# Altium PCB 遥控器.PcbDoc
Units mil, origin at the board's own origin, x right, y up, seen from the top; angles counter-clockwise.
Board outline 1455 x 3840 mil, 2 copper layers (Top Layer, Bottom Layer); 33 components, 26 nets, 144 pads, 0 vias.
Unrouted connection lines stored in the file: 1.
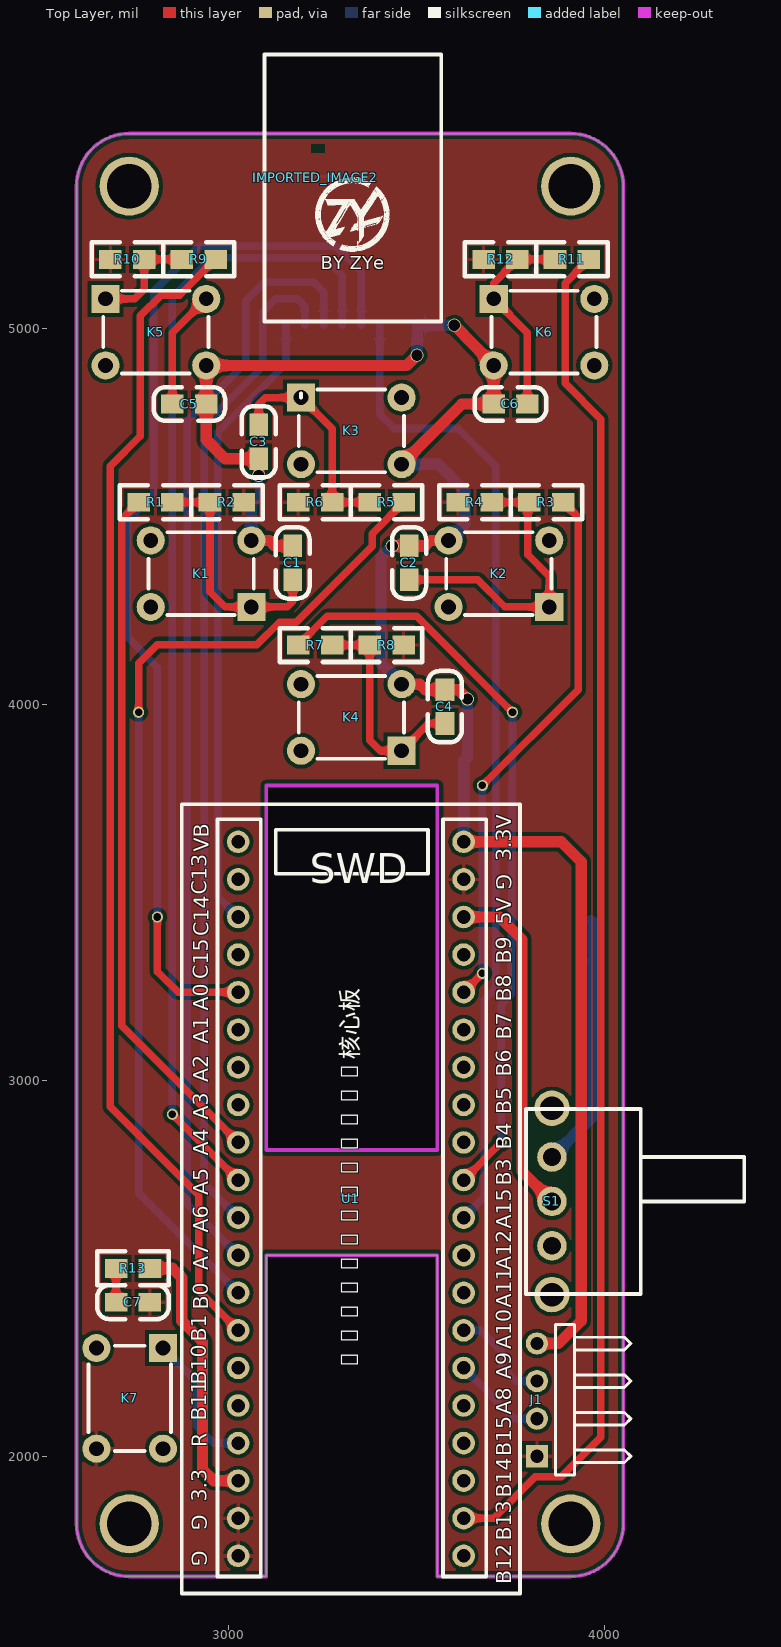
[diagram p0: Top Layer view]
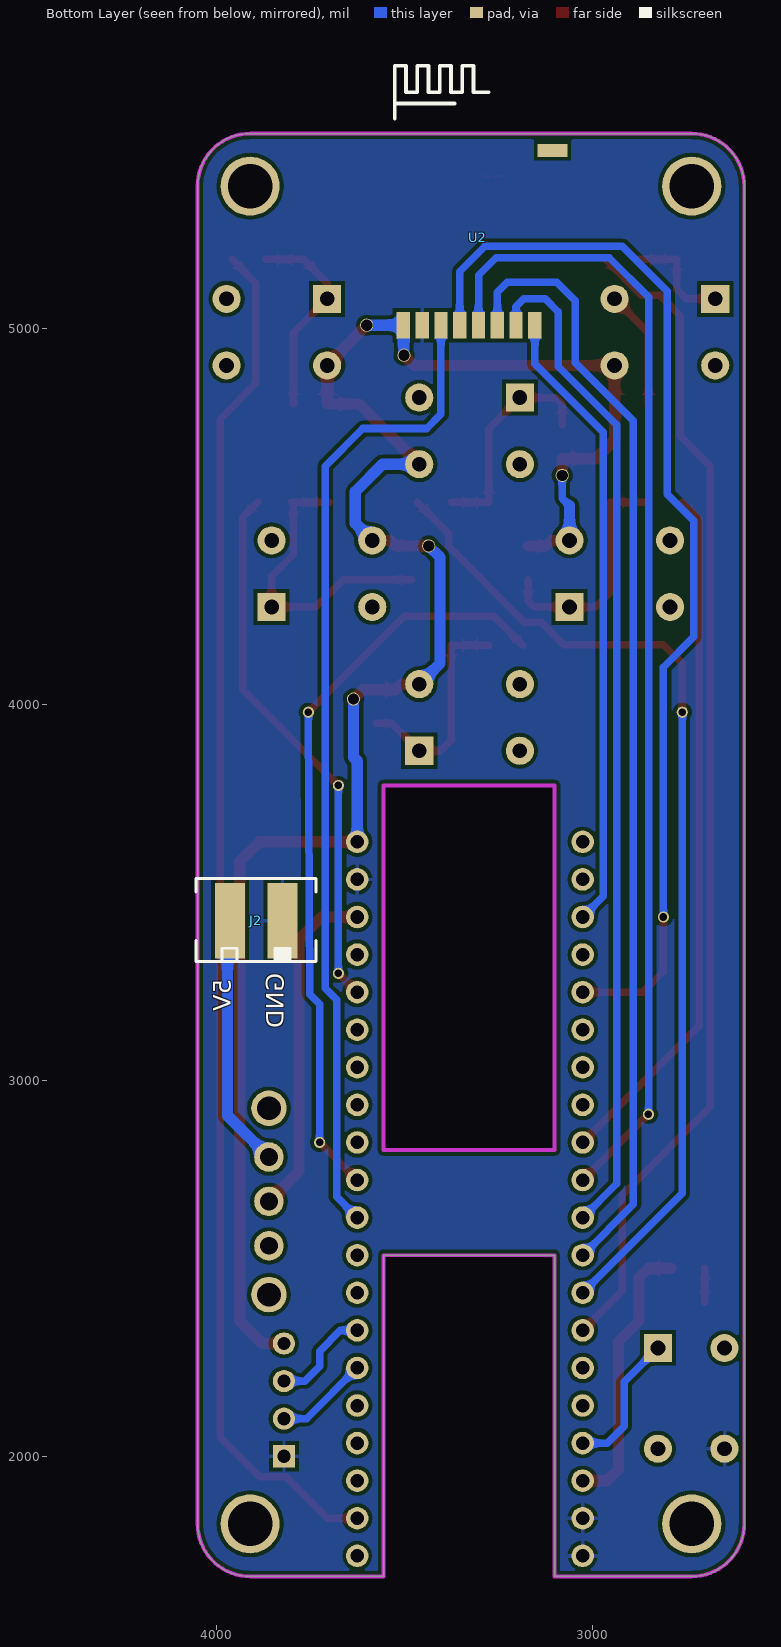
[diagram p1: Bottom Layer view, seen from below]
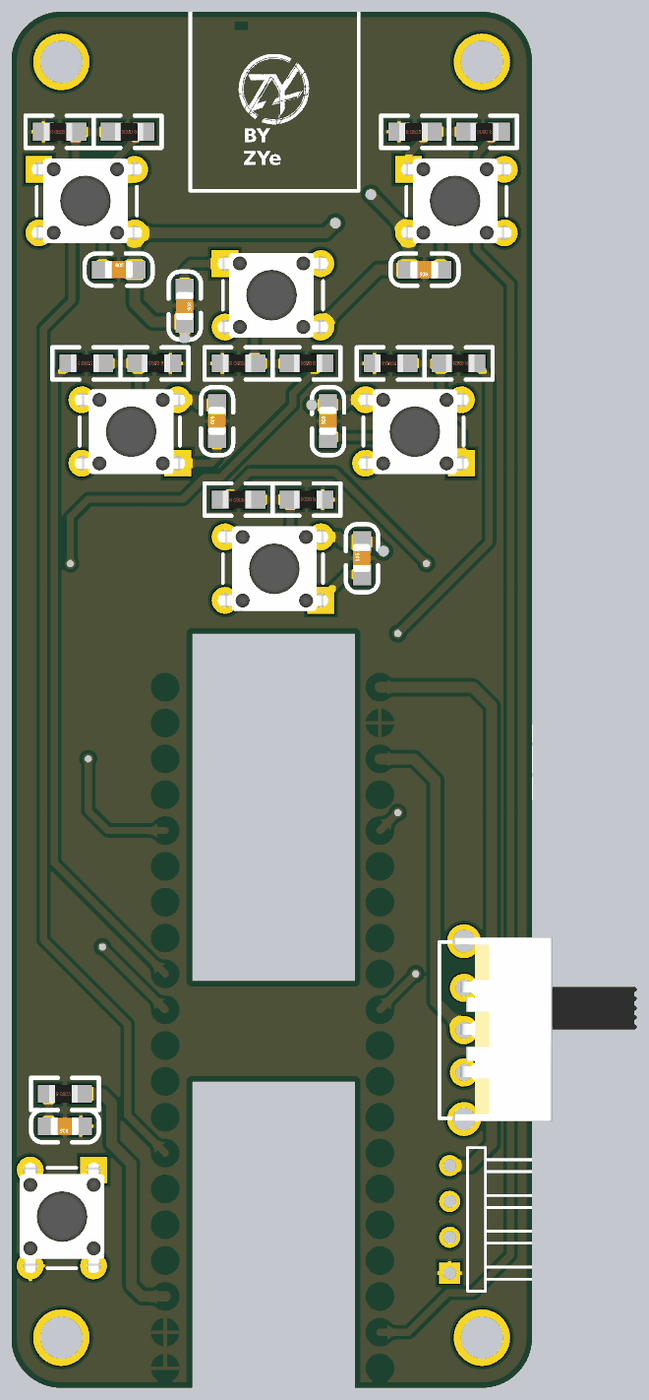
[diagram p2: 3D render of the assembled board from above, using the file's embedded part models]

## Layer stack, top to bottom
Top Solder: solder mask 0.4, Solder Resist, Dk 3.5
Top Layer: signal copper 1.4
Dielectric 1: dielectric 12.6, FR-4, Dk 4.8
Bottom Layer: signal copper 1.4
Bottom Solder: solder mask 0.4, Solder Resist, Dk 3.5

## Board outline
2595,1820 ccw(c2735,1820) 2735,1680 3100,1680 3100,2535 3555,2535 3555,1680 3910,1680 ccw(c3910,1820) 4050,1820 4050,5380 ccw(c3910,5380) 3910,5520 2735,5520 ccw(c2735,5380) 2595,5380
cut-out: 3100,2815 3555,2815 3555,3785 3100,3785

## Design rules (kind name [scope] priority, off if disabled: settings)
Clearance [All] p1: gap=10 ignorepadtopadclearanceinfootprint=FALSE except(0: Arc-Hole Track-Hole SMDPad-Hole THPad-Hole Via-Hole Fill-Hole Poly-Hole Region-Hole Text-Hole)
PolygonConnect [All] p1: connectstyle=Relief reliefconductorwidth=10 reliefentries=4 polygonreliefangle="90 Angle" airgapwidth=10
RoutingVias [All] p1: holewidth=28 width=50 viastyle="Through Hole" minholewidth=28 minwidth=50 maxholewidth=28 maxwidth=50
SolderMaskExpansion [All] p1: expansion=4
Width [All] p1: maxlimit=100 minlimit=20 preferedwidth=20
30 further rules are at their usual default settings.

## Components (designator, comment, footprint, x,y, rotation, side; value= is the part's Value field where it differs from the comment)
C1 "104" 0805C 3169.6,4333.27 r90 top
C2 "104" 0805C 3479.6,4333.27 r90 top
C3 "104" 0805C 3080,4743.89 r270 top
C4 "104" 0805C 3574.6,3950.71 r90 top
C5 "104" 0805C 2850.71,4800.54 r0 top
C6 "104" 0805C 3793.89,4799.88 r180 top
C7 "104" 0805C 2789.29,2409.6 r180 top
IMPORTED_IMAGE2 "Comment" IMPORTED_IMAGE 3230.35,5401.92 r0 top (schematic designator IMPORTED_IMAGE)
J1 "usart1" "Pin HDR1X4/2.54mm-W" 3820,2000 r90 top
J2 "PH2.0-2P" PH2.0S-2P 3855,3525 r0 bottom
K1 "KEY" DIP-6X6X5 3060,4260 r180 top
K2 "KEY" DIP-6X6X5 3852.72,4260 r180 top
K3 "KEY" DIP-6X6X5 3192.28,4817.17 r0 top
K4 "KEY" DIP-6X6X5 3460,3877.43 r180 top
K5 "KEY" DIP-6X6X5 2672.28,5080 r0 top
K6 "KEY" DIP-6X6X5 3705,5080 r0 top
K7 "KEY" DIP-6X6X5 2825,2287.72 r270 top
R1 "1K" 0805R 2760,4538.57 r0 top
R2 "4.7K" 0805R 3040,4538.57 r180 top
R3 "1K" 0805R 3890,4538.57 r180 top
R4 "4.7K" 0805R 3610,4538.57 r0 top
R5 "1K" 0805R 3465,4538.57 r180 top
R6 "4.7K" 0805R 3185,4538.57 r0 top
R7 "1K" 0805R 3185,4158.6 r0 top
R8 "4.7K" 0805R 3465,4158.6 r180 top
R9 "1K" 0805R 2965,5185 r180 top
R10 "4.7K" 0805R 2685,5185 r0 top
R11 "1K" 0805R 3958.12,5185 r180 top
R12 "4.7K" 0805R 3678.12,5185 r0 top
R13 "10K" 0805R 2700,2500 r0 top
S1 "SS-12F23" SS-12F23 3860,2430.08 r90 top
U1 "STM32F103C8T6核心板" STM32F103 4526.5,2909 r0 top
U2 "" "NRF24L01+ SMD" 3330.25,5354.78 r90 bottom

## Footprints (in the part's own frame and the unit in brackets; to place one, negate y for a bottom-side part, rotate by r counter-clockwise, add the part's x,y. Pads: shape width x height; smd on the part's side, far side on the other; paste and mask are expansions set on the pad)
0805C [mil]
  rect 60x50 smd: 1(-0.71,-0.4) 2(89.29,-0.4)
  silkscreen extent -51,-45 139,45, body extent 6,-25 84,25, height 31
0805R [mil]
  rect 60x50 smd: 1(0,0) 2(90,0)
  silkscreen extent -50,-45 140,45, body extent 1,-25 80,25, height 15
DIP-6X6X5 [mm]
  rect 1.9x1.9 hole 1: 1(0,0)
  round 1.9 hole 1: 2(0,-4.5) 3(6.8,-4.5) 4(6.8,0)
  silkscreen extent -0.16,-5.04 6.96,0.54, body extent -0.8,-5.24 7.41,0.76, height 4.95
IMPORTED_IMAGE [mil]
  silkscreen extent 0,-196 197,0
"NRF24L01+ SMD" [mil]
  rect 70.86x35.44 smd: 1(-344.78,172.01) 2(-344.78,122.01) 3(-344.78,72.01) 4(-344.78,22.01) 5(-344.78,-27.99) 6(-344.78,-77.99) 7(-344.78,-127.99) 8(-344.78,-177.99)
  rect 35.44x80 smd: 9(120,-225)
  silkscreen extent 205,-55 345,195
PH2.0S-2P [mil]
  rect 80x200 smd: 1(-31.26,100) 2(108.74,100)
  silkscreen extent -121,-12 199,208, body extent -117,-99 198,208, height 242
"Pin HDR1X4/2.54mm-W" [mm] "Connector; Header; 4 Position; Right Angle"
  rect 1.5x1.5 hole 0.9: 1(0,0)
  round 1.5 hole 0.9: 2(2.54,0) 3(5.08,0) 4(7.62,0)
  silkscreen extent -1.27,-6.35 8.89,-1.27, body extent -1.27,-10 8.89,0.35, height 2.54
SS-12F23 [mm]
  round 2.4 hole 1.6: 0(0,0) 0(12.6,0)
  round 2 hole 1.2: 1(3.3,0) 2(6.3,0) 3(9.3,0)
  silkscreen extent 0.05,-13 12.55,1.75, body extent -0.14,-12.27 12.86,0.63, height 5.75
STM32F103 [mil]
  round 60 hole 36: 1(-1501.5,726) 2(-1501.5,626) 3(-1501.5,526) 4(-1501.5,426) 5(-1501.5,326) 6(-1501.5,226) 7(-1501.5,126) 8(-1501.5,26) 9(-1501.5,-74) 10(-1501.5,-174) 11(-1501.5,-274) 12(-1501.5,-374) 13(-1501.5,-474) 14(-1501.5,-574) 15(-1501.5,-674) 16(-1501.5,-774) 17(-1501.5,-874) 18(-1501.5,-974) 19(-1501.5,-1074) 20(-1501.5,-1174) 21(-901.5,-1174) 22(-901.5,-1074) 23(-901.5,-974) 24(-901.5,-874) 25(-901.5,-774) 26(-901.5,-674) 27(-901.5,-574) 28(-901.5,-474) 29(-901.5,-374) 30(-901.5,-274) 31(-901.5,-174) 32(-901.5,-74) 33(-901.5,26) 34(-901.5,126) 35(-901.5,226) 36(-901.5,326) 37(-901.5,426) 38(-901.5,526) 39(-901.5,626) 40(-901.5,726)
  silkscreen extent -1652,-1274 -752,826

## Part data
C1 C2 C3 C4 C5 C6 C7: library part CAP, "无极性电容"
J1: library part "Pin HDR1X4"
R1 R2 R3 R4 R5 R6 R7 R8 R9 R10 R11 R12 R13: library part RES
U2: library part nRF24l01

## Free pads (board coordinates)
  round 157.48 hole 118.11: 2(2735,1820) 2(2735,5380) 2(3910,1820) 2(3910,5380)
  round 30 hole 20: 2(2760,3980) 2(2810,3435) 2(2850,2910) 2(3675,3285) 2(3675,3785) 2(3725,2835) 2(3755,3980)
  round 35 hole 30: 2(3079.6,4610) 2(3435,4422.57) 2(3500.69,4930) 2(3599.9,5010) 2(3635,4015)

## Nets (pads, with @x,y where several pads share a name; then routed paths per layer and width w, separated by ;. In a path a pad name is that pad's centre, name@x,y a point inside that pad or via, vN(x,y) a via of type N, cw(c..) or ccw(c..) an arc to the next point about the centre after c; other vN are vias at no path point)
+3.3V: C1.2 C2.2 C3.2 C4.2 C5.2 C6.2 J1.4 K1.2 K1.3 K2.3 K3.3 K4.2 K4.3 K5.3 K6.2 K6.3 pad.2@3079.6,4610 pad.2@3435,4422.57 pad.2@3500.69,4930 pad.2@3599.9,5010 pad.2@3635,4015 R13.2 U1.18 U1.40 U2.1 | length 5932.3
  Top Layer w30: R13.2 2850,2500 2875,2475 2875,2360 2930,2305 2930,1965 2960,1935 U1.18 ; K1.2 3107.83,4437.17 3122.43,4422.57 C1.2 ; pad.2@3079.6,4610 3080,4654.2 C3.2 2990.4,4654.6 2940,4705 C5.2 K5.3 3445.1,4902.83 3473.52,4902.83 pad.2@3500.69,4930 ; pad.2@3435,4422.57 C2.2 3522.57,4422.57 3537.17,4437.17 K2.3 ; K4.2 3507.97,4054.6 3522.57,4040 C4.2 3610,4040 pad.2@3635,4015 ; K3.3 3620.28,4800.28 C6.2 3704.6,4902.43 K6.2 pad.2@3599.9,5010 ; U1.40 3885,3635 3937.72,3582.28 3937.72,2360 3877.72,2300 J1.4
  Bottom Layer w20: 3060,4530 3079.6,4549.6 pad.2@3079.6,4610
  Bottom Layer w30: K1.2 3060,4530 ; pad.2@3435,4422.57 3405,4392.57 3405,4109.6 K4.2 ; K3.3 3557.57,4640 3630,4567.57 3630,4482.17 K2.3 ; pad.2@3500.69,4930 U2.1 pad.2@3599.9,5010 ; U1.40 3625,3850 3635,3860 pad.2@3635,4015
+5: S1.2 U1.38 | length 909.9
  Top Layer w30: U1.38 3720,3435 3780,3375 3780,2758.11 S1.2
GND: C7.1 J1.1 J2.1 K7.3 R2.1 R4.1 R6.1 R8.1 R10.1 R12.1 U1.19 U1.20 U1.39 U2.2
KEY1: R1.1 U1.9 | length 1850.6
  Top Layer w20: R1.1 2715,4493.57 2715,3145 U1.9
KEY2: pad.2@3675,3285 pad.2@3675,3785 R3.1 U1.36 | length 1446.5
  Top Layer w20: U1.36 pad.2@3675,3285 ; pad.2@3675,3785 3930,4040 3930,4498.57 R3.1
  Bottom Layer w20: pad.2@3675,3285 pad.2@3675,3785
KEY3: pad.2@2760,3980 R5.1 U1.13 | length 2686.9
  Top Layer w20: pad.2@2760,3980 2760,4110 2810,4160 3075,4160 3135,4220 3180,4220 3381.43,4421.43 3381.43,4455 R5.1
  Bottom Layer w20: pad.2@2760,3980 2760,2700 U1.13
KEY4: pad.2@3725,2835 pad.2@3755,3980 R7.1 U1.31 | length 2004.8
  Top Layer w20: R7.1 3261.4,4235 3500,4235 pad.2@3755,3980 ; U1.31 pad.2@3725,2835
  Bottom Layer w20: pad.2@3725,2835 3725,3203.25 3751.75,3230 pad.2@3755,3980
KEY5: R9.1 U1.14 | length 3136.1
  Top Layer w20: R9.1 2963.82,5185 2868.82,5090 2820,5090 2765,5035 2765,4715 2685,4635 2685,2930 2920,2695 2920,2440 U1.14
KEY6: R11.1 U1.22 | length 3654.6
  Top Layer w20: U1.22 3705,1835 3815,1945 3885,1945 3990,2050 3990,4760 3895,4855 3895,5121.88 R11.1
NetC1_1: C1.1 K1.1 R1.2 R2.2 | length 638.9
  Top Layer w20: R1.2 R2.2 2950,4300 2990,4260 K1.1 3155,4260 3170,4275 C1.1
NetC2_1: C2.1 K2.1 R3.2 R4.2 | length 807.1
  Top Layer w20: C2.1 3662.43,4332.57 3735,4260 K2.1 3852.72,4342.28 3795.32,4399.69 3795.32,4533.88 R3.2 R4.2
NetC3_1: C3.1 K3.1 R5.2 R6.2 | length 587.8
  Top Layer w20: C3.1 3079.6,4799.6 3097.17,4817.17 K3.1 3275,4734.45 R6.2 R5.2
NetC4_1: C4.1 K4.1 R7.2 R8.2 | length 595.1
  Top Layer w20: R7.2 R8.2 3375,3905 3402.57,3877.43 K4.1 3532.57,3950 C4.1
NetC5_1: C5.1 K5.1 K5.4 R9.2 R10.2 | length 610.2
  Top Layer w20: K5.1 2750,5080 2775,5105 R10.2 R9.2 ; C5.1 2850,4990 K5.4
NetC6_1: C6.1 K6.1 K6.4 R11.2 R12.2 | length 548
  Top Layer w20: C6.1 3794.6,4990.4 K6.1 3705,5121.88 R12.2 R11.2
NetC7_2: C7.2 R13.1 | length 90
  Top Layer w20: C7.2 R13.1
NetJ2_2: J2.2 S1.3 | length 676.9
  Bottom Layer w30: S1.3 3970,2906.22 3970,3418.74 J2.2
NRF_CE: U1.30 U2.3 | length 2637.3
  Bottom Layer w20: U2.3 3402.26,4772.74 3440,4735 3610,4735 3710,4635 3710,3245 3680,3215 3680,2690 U1.30
NRF_CSN: pad.2@2810,3435 U1.5 U2.4 | length 2882.7
  Top Layer w20: pad.2@2810,3435 2810,3290 2865,3235 U1.5
  Bottom Layer w20: pad.2@2810,3435 2810,4100 2729.68,4180.31 2729.68,4490 2800,4560.31 2800,5100 2920,5220 3285,5220 3352.26,5152.74 U2.4
NRF_IRQ: U1.3 U2.8 | length 1673.3
  Bottom Layer w20: U1.3 2970,3490 2970,4725 3152.26,4907.26 U2.8
NRF_MISO: U1.11 U2.7 | length 2696.5
  Bottom Layer w20: U1.11 2935,2725 2935,4375.63 2935,4745 3090,4900 3090,5045 3125,5080 3182.26,5080 3202.26,5060 U2.7
NRF_MOSI: U1.12 U2.6 | length 2986.2
  Bottom Layer w20: U1.12 2890,2670 2890,4755 3045,4910 3045,5075 3093.87,5123.87 3226.13,5123.87 3252.26,5097.74 U2.6
NRF_SCK: pad.2@2850,2910 U1.10 U2.5 | length 3070.7
  Top Layer w20: pad.2@2850,2910 U1.10
  Bottom Layer w20: pad.2@2849.68,2910 2849.68,5084.69 2955,5190 3255,5190 3302.26,5142.74 U2.5
NRST: K7.1 U1.17 | length 373.6
  Bottom Layer w20: K7.1 2915,2197.72 2915,2080 2960,2035 U1.17
USART1_RX: J1.3 U1.27 | length 274.4
  Bottom Layer w20: U1.27 3670,2335 3725,2280 3725,2240 3765,2200 J1.3
USART1_TX: J1.2 U1.26 | length 250.9
  Bottom Layer w20: U1.26 3760,2100 J1.2
pads on no net: K1.4 K2.2 K2.4 K3.2 K3.4 K4.4 K5.2 K7.2 K7.4 S1.0 S1.1 U1.1 U1.2 U1.4 U1.6 U1.7 U1.8 U1.15 U1.16 U1.21 U1.23 U1.24 U1.25 U1.28 U1.29 U1.32 U1.33 U1.34 U1.35 U1.37 U2.9

## Polygon pours and split planes (outlines as drawn)
GND on Top Layer "Top Layer-GND" (solid, remove dead copper, pour order 10): 2305,5695 2415,5585 2415,1550 4390,1550 4425,1585 4200,1810 4200,5785
GND on Bottom Layer "Bottom Layer-GND" (solid, remove dead copper, pour order 12): 2420,5645 2420,1450 2565,1305 2655,1395 4280,1395 4280,5920 4270,5930

## Keep-outs
Keep-Out Layer:
  lines w10: 2595,1820 ccw(c2735,1820) 2735,1680 3100,1680 3100,2535 3555,2535 3555,1680 3910,1680 ccw(c3910,1820) 4050,1820 4050,5380 ccw(c3910,5380) 3910,5520 2735,5520 ccw(c2735,5380) 2595,5380 2595,1820 ; 3100,2815 3555,2815 3555,3785 3100,3785 3100,2815

## Silkscreen, mask and mechanical layers (free items; w line width, h text height)
Top Overlay:
  lines w10: 3192.28,4817.17 3192.28,4828.7
  text "BY ZYe" at 3244.48,5146.92 h60
Bottom Overlay:
  text "GND" at 3805,3285 h80 r270
  text "5V" at 3945,3270 h80 r270
Mechanical 1:
  lines w10: 2595,1820 ccw(c2735,1820) 2735,1680 3100,1680 3100,2535 3555,2535 3555,1680 3910,1680 ccw(c3910,1820) 4050,1820 4050,5380 ccw(c3910,5380) 3910,5520 2735,5520 ccw(c2735,5380) 2595,5380 2595,1820 ; 3100,2815 3100,3785 3555,3785 3555,2815 3100,2815

## Text inside footprints (layer, text, board x,y; h text height)
U1: Top Overlay "G" at 2901.5,1844 h40 r270; Top Overlay "3.3V" at 3751.49,3584 h40 r90; Top Overlay "G" at 3711.5,3549 h40 r270; Top Overlay "5V" at 3751.49,3414 h40 r90; Top Overlay "B9" at 3751.49,3310 h40 r90; Top Overlay "B8" at 3751.49,3210 h40 r90; Top Overlay "B7" at 3751.49,3109 h40 r90; Top Overlay "B6" at 3751.49,3010 h40 r90; Top Overlay "B5" at 3751.49,2910 h40 r90; Top Overlay "B4" at 3751.49,2815 h40 r90; Top Overlay "B3" at 3751.49,2720 h40 r90; Top Overlay "A15" at 3751.49,2605 h40 r90; Top Overlay "A12" at 3751.49,2495 h40 r90; Top Overlay "A11" at 3751.49,2395 h40 r90; Top Overlay "A10" at 3751.49,2285 h40 r90; Top Overlay "A9" at 3751.49,2205 h40 r90; Top Overlay "A8" at 3751.49,2110 h40 r90; Top Overlay "B15" at 3751.49,2000 h40 r90; Top Overlay "B14" at 3751.49,1890 h40 r90; Top Overlay "B13" at 3751.49,1775 h40 r90; Top Overlay "B12" at 3751.49,1660 h40 r90; Top Overlay "VB" at 2946.5,3609 h40 r90; Top Overlay "C13" at 2941.5,3494 h40 r90; Top Overlay "C14" at 2946.5,3384 h40 r90; Top Overlay "C15" at 2945,3270 h40 r90; Top Overlay "A0" at 2945,3185 h40 r90; Top Overlay "A1" at 2945,3097.63 h40 r90; Top Overlay "A2" at 2945,2995 h40 r90; Top Overlay "A3" at 2945,2895 h40 r90; Top Overlay "A4" at 2945,2800 h40 r90; Top Overlay "A5" at 2945,2695 h40 r90; Top Overlay "A6" at 2945,2595 h40 r90; Top Overlay "A7" at 2945,2495 h40 r90; Top Overlay "B0" at 2945,2390 h40 r90; Top Overlay "B1" at 2940,2305 h40 r90; Top Overlay "B10" at 2940,2190 h40 r90; Top Overlay "B11" at 2940,2095 h40 r90; Top Overlay "R" at 2941.5,2024 h40 r90; Top Overlay "3.3" at 2941.5,1879 h40 r90; Top Overlay "G" at 2901.5,1749 h40 r270; Top Overlay "SWD" at 3215,3525 h80
U2: Mechanical 15 "IRQ" at 3135.57,5070 h39.37 r270; Mechanical 15 "MISO" at 3185.57,5070 h39.37 r270; Mechanical 15 "MOSI" at 3235.57,5070 h39.37 r270; Mechanical 15 "SCK" at 3285.57,5070 h39.37 r270; Mechanical 15 "CSN" at 3332.97,5070 h39.37 r270; Mechanical 15 "CE" at 3382.97,5070 h39.37 r270; Mechanical 15 "GND" at 3435.57,5070 h39.37 r270; Mechanical 15 "VCC" at 3485.57,5070 h39.37 r270